# Altium PCB File_PCB.PcbDoc
Units mil, origin at the board's own origin, x right, y up, seen from the top; angles counter-clockwise.
Board outline 5071.25 x 3605 mil, 2 copper layers (Top Layer, Bottom Layer); 56 components, 23 nets, 162 pads, 0 vias.
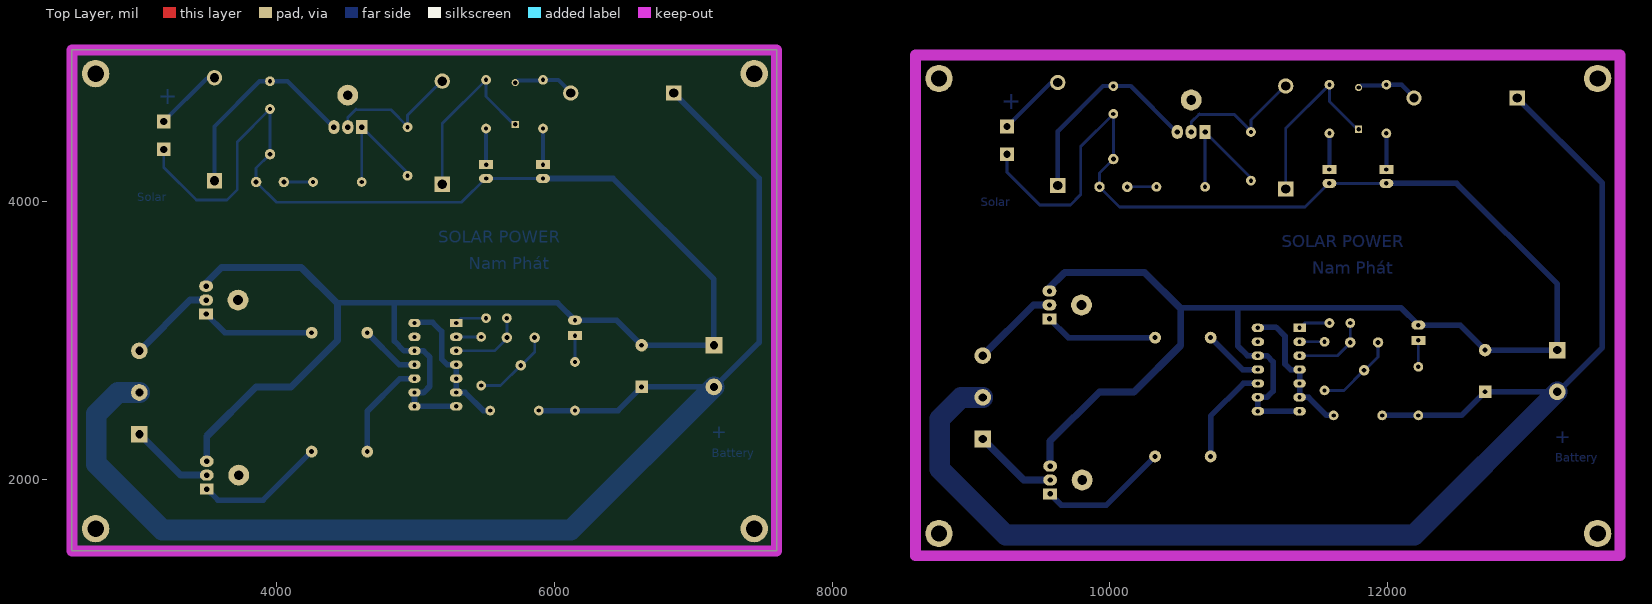
[diagram p0: Top Layer view]
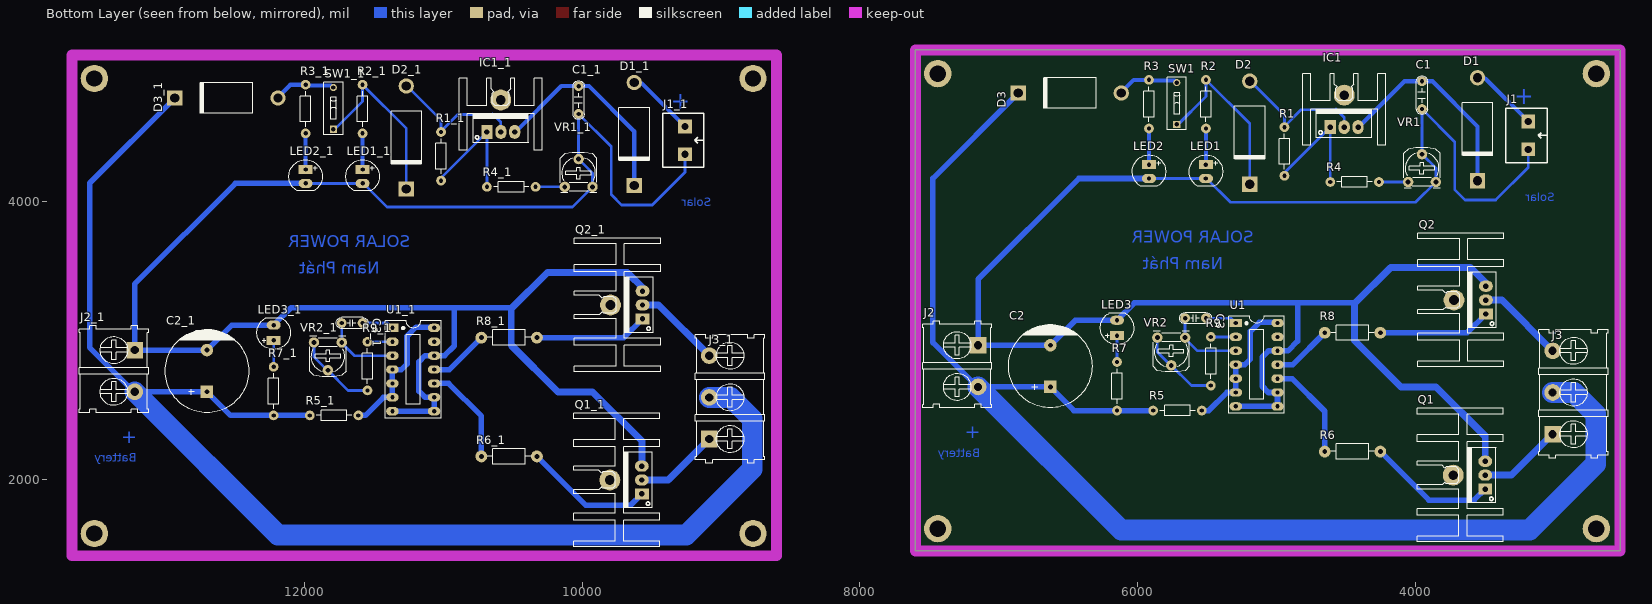
[diagram p1: Bottom Layer view, seen from below]

## Layer stack, top to bottom
Top Solder: solder mask 0.4, Solder Resist, Dk 3.5
Top Layer: signal copper 1.4
Dielectric 1: dielectric 12.6, FR-4, Dk 4.8
Bottom Layer: signal copper 1.4
Bottom Solder: solder mask 0.4, Solder Resist, Dk 3.5

## Board outline
2530,1485 2530,5090 7601.25,5090 7601.25,1485

## Design rules (kind name [scope] priority, off if disabled: settings)
Clearance [All] p1: gap=20 ignorepadtopadclearanceinfootprint=FALSE
PolygonConnect [All] p1: connectstyle=Relief reliefconductorwidth=10 reliefentries=4 polygonreliefangle="90 Angle" airgapwidth=10
RoutingLayers [All] p1: top layer_v5=FALSE bottom layer_v5=TRUE
RoutingVias [All] p1: holewidth=30 width=70 viastyle="Through Hole" minholewidth=30 minwidth=70 maxholewidth=30 maxwidth=70
SolderMaskExpansion [All] p1: expansion=4
Width [All] p1: maxlimit=150 minlimit=20 preferedwidth=20
29 further rules are at their usual default settings.

## Classes and differential pairs
component class File_Nguyen_Ly: C1 C2 C3 D1 D2 D3 IC1 J1 J2 J3 LED1 LED2 LED3 Q1 Q2 R1 R2 R3 R4 R5 R6 R7 R8 R9 SW1 U1 VR1 VR2

## Components (designator, comment, footprint, x,y, rotation, side; value= is the part's Value field where it differs from the comment)
C1 "104" CN2 3955,4665 r90 bottom value=0.1uF
C1_1 "104" CN2 10025,4630 r90 bottom value=0.1uF (schematic designator C1)
C2 "1000uF/50V" CP3/7 6630,2665 r90 bottom value=2200uF/16V
C2_1 "1000uF/50V" CP3/7 12700,2630 r90 bottom value=2200uF/16V (schematic designator C2)
C3 "103" CN1.5 5660,3160 r180 bottom value=0.01uF
C3_1 "103" CN1.5 11730,3125 r180 bottom value=0.01uF (schematic designator C3)
D1 "Diode 1N5408" DO-201AD 3555,4520 r270 bottom
D1_1 "Diode 1N5408" DO-201AD 9625,4485 r270 bottom (schematic designator D1)
D2 "Diode 1N5408" DO-201AD 5195,4495 r270 bottom
D2_1 "Diode 1N5408" DO-201AD 11265,4460 r270 bottom (schematic designator D2)
D3 "Diode 1N5408" DO-201AD 6490,4780 r0 bottom
D3_1 "Diode 1N5408" DO-201AD 12560,4745 r0 bottom (schematic designator D3)
IC1 "LM317" TO220H1 4515,4535 r180 bottom
IC1_1 "LM317" TO220H1 10585,4500 r180 bottom (schematic designator IC1)
J1 "KF2" KF2-5.08 3190,4475 r270 bottom
J1_1 "KF2" KF2-5.08 9260,4440 r270 bottom (schematic designator J1)
J2 "KF2" KF2-7.62 7300,2815 r270 bottom
J2_1 "KF2" KF2-7.62 13370,2780 r270 bottom (schematic designator J2)
J3 "KF3" KF3-7.62 2865,2475 r90 bottom
J3_1 "KF3" KF3-7.62 8935,2440 r90 bottom (schematic designator J3)
LED1 "LED" LED-5-Green 5510,4265 r270 bottom value="LED 3 ly Single Colour"
LED1_1 "LED" LED-5-Green 11580,4230 r270 bottom value="LED 3 ly Single Colour" (schematic designator LED1)
LED2 "LED" LED-5-RED 5920,4265 r270 bottom value="LED 3 ly Single Colour"
LED2_1 "LED" LED-5-RED 11990,4230 r270 bottom value="LED 3 ly Single Colour" (schematic designator LED2)
LED3 "LED" LED-5-BLUE 6150,3090 r90 bottom value="LED 3 ly Single Colour"
LED3_1 "LED" LED-5-BLUE 12220,3055 r90 bottom value="LED 3 ly Single Colour" (schematic designator LED3)
Q1 "IRFZ44" TO220H2 3500,2030 r90 bottom value=IRF840
Q1_1 "IRFZ44" TO220H2 9570,1995 r90 bottom value=IRF840 (schematic designator Q1)
Q2 "IRFZ44" TO220H2 3495,3290 r90 bottom value=IRF840
Q2_1 "IRFZ44" TO220H2 9565,3255 r90 bottom value=IRF840 (schematic designator Q2)
R1 "220" R1/4W 4945,4185 r90 bottom value="R1/4W - 1K"
R1_1 "220" R1/4W 11015,4150 r90 bottom value="R1/4W - 1K" (schematic designator R1)
R2 "2k" R1/4W 5510,4875 r270 bottom value="R1/4W - 1K"
R2_1 "2k" R1/4W 11580,4840 r270 bottom value="R1/4W - 1K" (schematic designator R2)
R3 "2k" R1/4W 5920,4875 r270 bottom value="R1/4W - 1K"
R3_1 "2k" R1/4W 11990,4840 r270 bottom value="R1/4W - 1K" (schematic designator R3)
R4 "680" R1/4W 4265,4140 r0 bottom value="R1/4W - 1K"
R4_1 "680" R1/4W 10335,4105 r0 bottom value="R1/4W - 1K" (schematic designator R4)
R5 "330" R1/4W 5540,2495 r0 bottom value="R1/4W - 1K"
R5_1 "330" R1/4W 11610,2460 r0 bottom value="R1/4W - 1K" (schematic designator R5)
R6 "220" R1/2W 4255,2200 r0 bottom value="R1/4W - 1K"
R6_1 "220" R1/2W 10325,2165 r0 bottom value="R1/4W - 1K" (schematic designator R6)
R7 "1k" R1/4W 6150,2845 r270 bottom value="R1/4W - 1K"
R7_1 "1k" R1/4W 12220,2810 r270 bottom value="R1/4W - 1K" (schematic designator R7)
R8 "220" R1/2W 4255,3055 r0 bottom value="R1/4W - 1K"
R8_1 "220" R1/2W 10325,3020 r0 bottom value="R1/4W - 1K" (schematic designator R8)
R9 "390k" R1/4W 5475,3025 r270 bottom value="R1/4W - 1K"
R9_1 "390k" R1/4W 11545,2990 r270 bottom value="R1/4W - 1K" (schematic designator R9)
SW1 "SW" SW-DIP1-1 5720,4705 r180 bottom value="SW chip 2 pin"
SW1_1 "SW" SW-DIP1-1 11790,4670 r180 bottom value="SW chip 2 pin" (schematic designator SW1)
U1 "CD4047" DIP14/W0.3 5295,3125 r270 bottom
U1_1 "CD4047" DIP14/W0.3 11365,3090 r270 bottom (schematic designator U1)
VR1 "2K" VR 4055,4140 r180 bottom value="VR 10K"
VR1_1 "2K" VR 10125,4105 r180 bottom value="VR 10K" (schematic designator VR1)
VR2 "100K" VR 5660,3020 r0 bottom value="VR 10K"
VR2_1 "100K" VR 11730,2985 r0 bottom value="VR 10K" (schematic designator VR2)

## Footprints (in the part's own frame and the unit in brackets; to place one, negate y for a bottom-side part, rotate by r counter-clockwise, add the part's x,y. Pads: shape width x height; smd on the part's side, far side on the other; paste and mask are expansions set on the pad)
CN1.5 [mil]
  round 70 hole 31: 1(0,0) 2(150,0)
  silkscreen extent -40,-40 190,40, body extent -40,-33 190,33, height 235
CN2 [mil]
  round 70 hole 31: 1(0,0) 2(200,0)
  silkscreen extent -40,-40 240,40, body extent -54,-44 260,55, height 407
CP3/7 [mil] "Tu hoa 4700uF/25V"
  rect 90x90 hole 35: 1(0,0)
  round 90 hole 35: 2(300,0)
  silkscreen extent -150,-300 450,300
DIP14/W0.3 [mil] "14PIN, W 300mil, Pin to pin 100mil"
  rect 60x90 hole 31: 1(0,0)
  oval 60x90 hole 31: 2(100,0) 3(200,0) 4(300,0) 5(400,0) 6(500,0) 7(600,0) 8(600,300) 9(500,300) 10(400,300) 11(300,300) 12(200,300) 13(100,300) 14(0,300)
  silkscreen extent -50,-50 650,350, body extent -70,-12 680,302, height 145
DO-201AD [mm] "Diode, Axial; Body 9.5 x 5.6 mm (LxDia. max), Lead Dia. 1.32 mm (max)"
  round 2.8 hole 1.7: 1(-9.42,0)
  rect 2.8x2.8 hole 1.7: 2(9.42,0)
  silkscreen extent -4.8,-2.8 4.9,2.8
KF2-5.08 [mm]
  rect 2.5x2.5 hole 1.3: 1(-2.54,0) 2(2.54,0)
  silkscreen extent -4.95,-4.08 4.95,3.43, body extent -5,-4.07 5,3.43, height 10
KF2-7.62 [mil]
  rect 120x120 hole 59.06 unplated: 1(-150,150)
  round 120 hole 59.06 unplated: 2(150,150)
  silkscreen extent -324,-250 300,250, body extent -300,-241 300,231, height 337
KF3-7.62 [mil]
  rect 120x120 hole 59.06 unplated: 1(-150,150)
  round 120 hole 59.06 unplated: 2(150,150) 3(450,150)
  silkscreen extent -324,-250 600,250, body extent -300,-241 600,231, height 337
LED-5-BLUE [mil] "LED 2 PIN, 5 ly , Only colour, pin to pin 110mil"
  rect 65x100 hole 32: 1(-55,0)
  oval 65x100 hole 32: 2(55,0)
  silkscreen extent -120,-120 104,120, body extent -113,-120 100,116, height 339
LED-5-Green [mil] "LED 2 PIN, 5 ly , Only colour,pin to pin 100mil"
  rect 65x100 hole 32: 1(0,0)
  oval 65x100 hole 32: 2(100,0)
  silkscreen extent -70,-120 154,120, body extent -69,-120 145,117, height 339
LED-5-RED [mil] "LED 2 PIN, 5 ly , Only colour,pin to pin 100mil"
  rect 65x100 hole 32: 1(0,0)
  oval 65x100 hole 32: 2(100,0)
  silkscreen extent -70,-120 154,120, body extent -65,-119 149,118, height 339
R1/2W [mil] "R 1/2W, 2 pin, 300mil"
  round 85 hole 35: 1(0,0) 2(400,0)
  silkscreen extent 42,-55 356,55, body extent -12,-45 414,49, height 91
R1/4W [mil] "R 1/4W, 2 Pin, 350mil"
  round 70 hole 31: 1(0,0) 2(350,0)
  silkscreen extent 48,-38 302,38, body extent -40,-47 386,47, height 111
SW-DIP1-1 [mm] "01p, 2.54mm Pitch, Horizontal, Box Type, THT, flat Actuator, red, without Tape, Tube"
  rect 1.3x1.3 hole 0.8: 1(0,-3.81)
  round 1.3 hole 0.8: 2(0,3.81)
  silkscreen extent -1.77,-4.8 1.77,4.8, body extent -1.77,-4.8 1.77,4.8, height 5.4
TO220H1 [mil] "TO-220 - 1-2-3"
  round 150 hole 70: 0(0,230)
  rect 80x100 hole 39: 1(-100,0)
  oval 80x100 hole 39: 2(0,0) 3(100,0)
  silkscreen extent -300,-130 300,385, body extent -246,-82 250,329, height 1000
TO220H2 [mil] "TO-220 - 1-2-3"
  round 150 hole 70: 0(0,230)
  rect 80x100 hole 39: 1(-100,0)
  oval 80x100 hole 39: 2(0,0) 3(100,0)
  silkscreen extent -480,-130 480,490, body extent -449,-177 453,469, height 1206
VR [mil] "Resistor Variable"
  round 75 hole 35: 1(0,0) 2(100,200) 3(200,0)
  silkscreen extent -31,-44 231,246, body extent -87,-30 307,372, height 165

## Part data
C1 C1_1: library part CN2, "Cap np 104 => 105pF"
C2 C2_1: library part CP6, "Cap 4700uF/16V - 2200uF/50V", Description 1="10KuF=>22KuF/6,3V - 6800uF=>15KuF/10V", Description 2="4700uF=>10KuF/16V - 3300uF => 6800uF/25V", Description 3=2200uF=>3300uF/50V_1KuF=>2200uF/63V, Description 4="470uF => 1KuF/100V - 220uF-470uF/160V", Description 5="100uF=>220uF/200V -100uF=>330uF/350V", Description 6="33uF=>100/350V-400V  -  22uF=>33uF/450V"
C3 C3_1: library part CN1.5, "Cap np 682pF => 104pF"
D1 D1_1 D2 D2_1 D3 D3_1: "3 Amp Medium Power Silicon Rectifier Diode", ComponentLink1Description="Manufacturer Link", ComponentLink1URL=http://www.irf.com/, DatasheetVersion=Aug-1984, LatestRevisionDate=17-Jul-2002, LatestRevisionNote="Re-released for DXP Platform.", PackageDescription="Diode, Axial; Body 9.5 x 5.3 mm (LxDia. max), Lead Dia. 1.32 mm (max)", PackageReference=DO-201AD, Published=8-Jun-2000, Publisher="Altium Limited"
IC1 IC1_1: "Adj Voltage +1.2 -> +37V"
J1 J1_1 J2 J2_1: Manufacturer="Würth Elektronik eiSos GmbH", partNo=691103110002, ComponentLink1 Description=Manufacturer, ComponentLink1URL=http://www.we-online.com, ComponentLink2 Description=Datasheet, ComponentLink2URL=http://katalog.we-online.de/em/datasheet/6911031100xx.pdf, Created by="Karrer Zheng", Created Date="29 October 2013", NoPins=2
J3 J3_1: Manufacturer="Würth Elektronik eiSos GmbH", partNo=691103110003, ComponentLink1 Description=Manufacturer, ComponentLink1URL=http://www.we-online.com, ComponentLink2 Description=Datasheet, ComponentLink2URL=http://katalog.we-online.de/em/datasheet/6911031100xx.pdf, Created by="Karrer Zheng", Created Date="29 October 2013", NoPins=3
LED1 LED1_1 LED2 LED2_1 LED3 LED3_1: "LED Single colour Green and Red"
R1 R1_1 R2 R2_1 R3 R3_1 R4 R4_1 R5 R5_1 R6 R6_1 R7 R7_1 R8 R8_1 R9 R9_1: library part R1/4W, "Resistor 1/4W"
SW1 SW1_1: library part SW2, "Switch button 2 pin"
VR1 VR1_1 VR2 VR2_1: library part VR, "Var Resistor"

## Free pads (board coordinates)
  round 196.85 hole 118.11: 1(2700,1645) 1(2700,4920) 1(7440,1645) 1(7440,4920) 1(8770,1610) 1(8770,4885) 1(13510,1610) 1(13510,4885)

## Nets (pads, with @x,y where several pads share a name; then routed paths per layer and width w, separated by ;. In a path a pad name is that pad's centre, name@x,y a point inside that pad or via, vN(x,y) a via of type N, cw(c..) or ccw(c..) an arc to the next point about the centre after c; other vN are vias at no path point)
+12: C2.1 D3.2 J2.2 J3.2 R5.2 R7.2 | length 9634.9
  Bottom Layer w40: R5.2 R7.2 6460,2495 C2.1 J2.2 ; D3.2 7475,4165.87 7475,2985 J2.2@7155,2665
  Bottom Layer w150: J3.2 2860,2625 2705,2470 2705,2110 3180,1635 6120,1635 J2.2
GND: C1.1 C2.2 J1.2 J2.1 LED1.2 LED2.2 LED3.2 Q1.3 Q2.3 U1.7 U1.8 U1.9 U1.12 VR1.2 VR1.3 | length 13167.1
  Bottom Layer w20: J1.2 3190,4245 3425,4010 3645,4010 3720,4085 3720,4430 C1.1 VR1.2@3955,4355 ; VR1.2 3855,4240 VR1.3 4000,3995 5335,3995 LED1.2@5510,4170 ; 5060,2625 5065,2630 ; LED1.2 LED2.2 ; J2.1 J2.1@7150,2970
  Bottom Layer w40: 4440,3260 4450,3270 4850,3270 ; 5060,2625 U1.9 U1.8 U1.7 ; 5065,2630 5105,2670 5105,2880 5060,2925 U1.12 4920,2925 4850,2995 4850,3270 ; LED2.2 6425,4165 7150,3440 J2.1@7150,2970 ; J2.1 C2.2 6450,3145 LED3.2 6025,3270 4850,3270
  Bottom Layer w50: Q2.3@3480,3400 3605,3525 4180,3525 4440,3265 4440,3260 4440,3000 4105,2665 3855,2665 3500,2310 Q1.3
NetC1_2: C1.2 D1.2 IC1.3 | length 1517.2
  Bottom Layer w30: D1.2 3555,4540 3880,4865 C1.2 4080,4865 IC1.3@4410,4535
NetC3_1: C3.1 U1.3 VR2.1 | length 554.4
  Bottom Layer w20: U1.3@5285,2925 U1.3 5570,2925 VR2.1@5660,3015 ; C3.1@5655,3160 5660,3155 VR2.1
NetC3_2: C3.2 U1.1 | length 224.5
  Bottom Layer w20: U1.1 5330,3160 C3.2@5505,3160
NetD1_1: D1.1 J1.1 | length 493.4
  Bottom Layer w30: J1.1 3500,4885 D1.1@3555,4885
NetD2_1: D2.1 IC1.2 R1.2 | length 1032.3
  Bottom Layer w20: IC1.2 4515,4605 4570,4660 ; 4575,4665 4570,4660 ; R1.2 R1.2@4945,4540 ; R1.2@4955,4530 R1.2@4945,4540 ; D2.1@5195,4870 4945,4620 R1.2@4945,4540 ; 4570,4660 4825,4660 R1.2@4945,4540
NetD2_2: D2.2 R2.1 SW1.1 | length 1298.3
  Bottom Layer w20: D2.2 5195,4560 R2.1 5510,4755 SW1.1@5720,4545
NetD3_1: D3.1 R3.1 SW1.2 | length 448.5
  Bottom Layer w30: SW1.2 5735,4870 R3.1@5925,4870 ; R3.1 6030,4875 D3.1@6120,4785
NetIC1_1: IC1.1 R1.1 R4.2 | length 883.8
  Bottom Layer w20: R4.2 IC1.1 4950,4200 R1.1@4950,4185
NetJ3_1: J3.1 Q1.2 | length 607.2
  Bottom Layer w50: J3.1 3310,2030 Q1.2
NetJ3_3: J3.3 Q2.2 | length 631.2
  Bottom Layer w50: J3.3 3380,3290 Q2.2
NetLED1_1: LED1.1 R2.2 | length 265
  Bottom Layer w30: LED1.1@5510,4260 LED1.1 R2.2
NetLED2_1: LED2.1 R3.2 | length 270
  Bottom Layer w30: LED2.1@5920,4255 LED2.1 R3.2
NetLED3_1: LED3.1 R7.1 | length 200
  Bottom Layer w20: R7.1 LED3.1 LED3.1@6150,3045
NetQ1_1: Q1.1 R6.1 | length 933.1
  Bottom Layer w40: Q1.1 3580,1850 3905,1850 R6.1
NetQ2_1: Q2.1 R8.1 | length 819.5
  Bottom Layer w20: Q2.1@3500,3200 Q2.1@3502.5,3197.5
  Bottom Layer w40: Q2.1 3630,3055 R8.1
NetR4_1: R4.1 VR1.1 | length 222.1
  Bottom Layer w20: VR1.1 R4.1 4270,4140 R4.1@4275,4135
NetR5_1: R5.1 U1.4 U1.5 U1.6 U1.14 | length 1034.4
  Bottom Layer w20: U1.6@5300,2630 U1.6@5305,2625
  Bottom Layer w40: U1.14@5000,3130 5125,3130 5190,3065 5190,2865 5230,2825 U1.4 U1.5 U1.6 ; U1.6@5305,2625 5360,2625 5490,2495 R5.1
NetR6_2: R6.2 U1.10 | length 727.3
  Bottom Layer w40: R6.2 4655,2490 4890,2725 U1.10
NetR8_2: R8.2 U1.11 | length 442.3
  Bottom Layer w20: R8.2@4650,3060 R8.2
  Bottom Layer w40: R8.2 4885,2825 U1.11
NetR9_1: R9.1 U1.2 | length 185
  Bottom Layer w20: U1.2 R9.1@5480,3025
NetR9_2: R9.2 VR2.2 VR2.3 | length 593.6
  Bottom Layer w20: R9.2@5475,2680 5480,2675 5615,2675 VR2.2 ; VR2.2@5760,2815 5860,2915 VR2.3
pads on no net: C1_1.1 C1_1.2 C2_1.1 C2_1.2 C3_1.1 C3_1.2 D1_1.1 D1_1.2 D2_1.1 D2_1.2 D3_1.1 D3_1.2 IC1.0 IC1_1.0 IC1_1.1 IC1_1.2 IC1_1.3 J1_1.1 J1_1.2 J2_1.1 J2_1.2 J3_1.1 J3_1.2 J3_1.3 LED1_1.1 LED1_1.2 LED2_1.1 LED2_1.2 LED3_1.1 LED3_1.2 Q1.0 Q1_1.0 Q1_1.1 Q1_1.2 Q1_1.3 Q2.0 Q2_1.0 Q2_1.1 Q2_1.2 Q2_1.3 R1_1.1 R1_1.2 R2_1.1 R2_1.2 R3_1.1 R3_1.2 R4_1.1 R4_1.2 R5_1.1 R5_1.2 R6_1.1 R6_1.2 R7_1.1 R7_1.2 R8_1.1 R8_1.2 R9_1.1 R9_1.2 SW1_1.1 SW1_1.2 U1.13 U1_1.1 U1_1.2 U1_1.3 U1_1.4 U1_1.5 U1_1.6 U1_1.7 U1_1.8 U1_1.9 U1_1.10 U1_1.11 U1_1.12 U1_1.13 U1_1.14 VR1_1.1 VR1_1.2 VR1_1.3 VR2_1.1 VR2_1.2 VR2_1.3
copper on no net: | length 36184.9
  Bottom Layer w20: 9260,4340 9260,4210 9495,3975 9715,3975 9790,4050 9790,4395 10025,4630 10025,4320 ; 9570,3165 9572.5,3162.5 ; 10025,4305 9925,4205 9925,4105 10070,3960 11405,3960 11580,4135 ; 10125,4105 10335,4105 10340,4105 10345,4100 ; 10585,4500 10585,4570 10640,4625 ; 10645,4630 10640,4625 ; 10685,4105 10685,4500 11020,4165 11020,4150 ; 10720,3025 10725,3020 ; 11015,4500 11015,4505 ; 11025,4495 11015,4505 ; 11130,2590 11135,2595 ; 11265,4089.13 11265,4525 11580,4840 11580,4720 11790,4510 ; 11265,4835 11015,4585 11015,4505 ; 11355,2890 11365,2890 11640,2890 11730,2980 ; 11365,2990 11550,2990 ; 11365,3090 11400,3125 11575,3125 ; 11370,2595 11375,2590 ; 11545,2645 11550,2640 11685,2640 11830,2785 ; 11580,4130 11990,4130 ; 11725,3125 11730,3120 11730,2985 ; 11830,2780 11930,2880 11930,2985 ; 12220,2810 12220,3000 12220,3010 ; 13220,2930 13220,2935 ; 10640,4625 10895,4625 11015,4505
  Bottom Layer w30: 9260,4540 9570,4850 9625,4850 ; 9625,4114.13 9625,4505 9950,4830 10025,4830 10150,4830 10480,4500 ; 11580,4225 11580,4230 11580,4490 ; 11790,4820 11805,4835 11995,4835 ; 11990,4220 11990,4230 11990,4490 ; 11990,4840 12100,4840 12190,4750
  Bottom Layer w40: 9565,3155 9700,3020 10325,3020 ; 9570,1895 9650,1815 9975,1815 10325,2165 ; 10510,3225 10520,3235 10920,3235 ; 10725,2165 10725,2455 10960,2690 11065,2690 ; 10725,3020 10955,2790 11065,2790 ; 11070,3095 11195,3095 11260,3030 11260,2830 11300,2790 11365,2790 11365,2690 11365,2590 ; 11130,2590 11065,2590 11065,2490 11365,2490 ; 11135,2595 11175,2635 11175,2845 11130,2890 11065,2890 10990,2890 10920,2960 10920,3235 ; 11375,2590 11430,2590 11560,2460 11610,2460 ; 11960,2460 12220,2460 12530,2460 12700,2630 13220,2630 ; 11990,4130 12495,4130 13220,3405 13220,2935 ; 12930.87,4745 13545,4130.87 13545,2950 13225,2630 ; 13220,2930 12700,2930 12520,3110 12220,3110 12095,3235 10920,3235
  Bottom Layer w50: 9085,2290 9380,1995 9570,1995 ; 9085,2890 9450,3255 9565,3255 ; 9550,3365 9675,3490 10250,3490 10510,3230 10510,3225 10510,2965 10175,2630 9925,2630 9570,2275 9570,2095
  Bottom Layer w150: 9085,2590 8930,2590 8775,2435 8775,2075 9250,1600 12190,1600 13220,2630

## Keep-outs
Keep-Out Layer:
  lines w78.74: 2530,1485 2530,5090 7601.25,5090 7601.25,1485 2530,1485 ; 8600,1450 13671.25,1450 13671.25,5055 8600,5055 8600,1450

## Other copper
Bottom Layer:
  region: 13205,2930
  region net GND: 7135,2965
  text "+" at 3150,4700 h120
  text "+" at 9220,4665 h120
  text "Solar" at 3000,4000 h60
  text "Solar" at 9070,3965 h60
  text "SOLAR POWER" at 5165,3675 h150
  text "SOLAR POWER" at 11235,3640 h150
  text "Nam Phát" at 5385,3485 h150
  text "Nam Phát" at 11455,3450 h150
  text "+" at 7130,2295 h100
  text "+" at 13200,2260 h100
  text "Battery" at 7135,2160 h60
  text "Battery" at 13205,2125 h60

## Dimensions
8000,5130 to 7820,1445 on Multi-Layer
2490,5405 to 7640,5280 on Multi-Layer